# Altium PCB PCB1.PcbDoc (part 4 of 4)
Units mil, origin at the board's own origin, x right, y up, seen from the top; angles counter-clockwise.
Board outline 1280 x 1960 mil, 2 copper layers (Top Layer, Bottom Layer); 39 components, 61 nets, 283 pads, 76 vias.
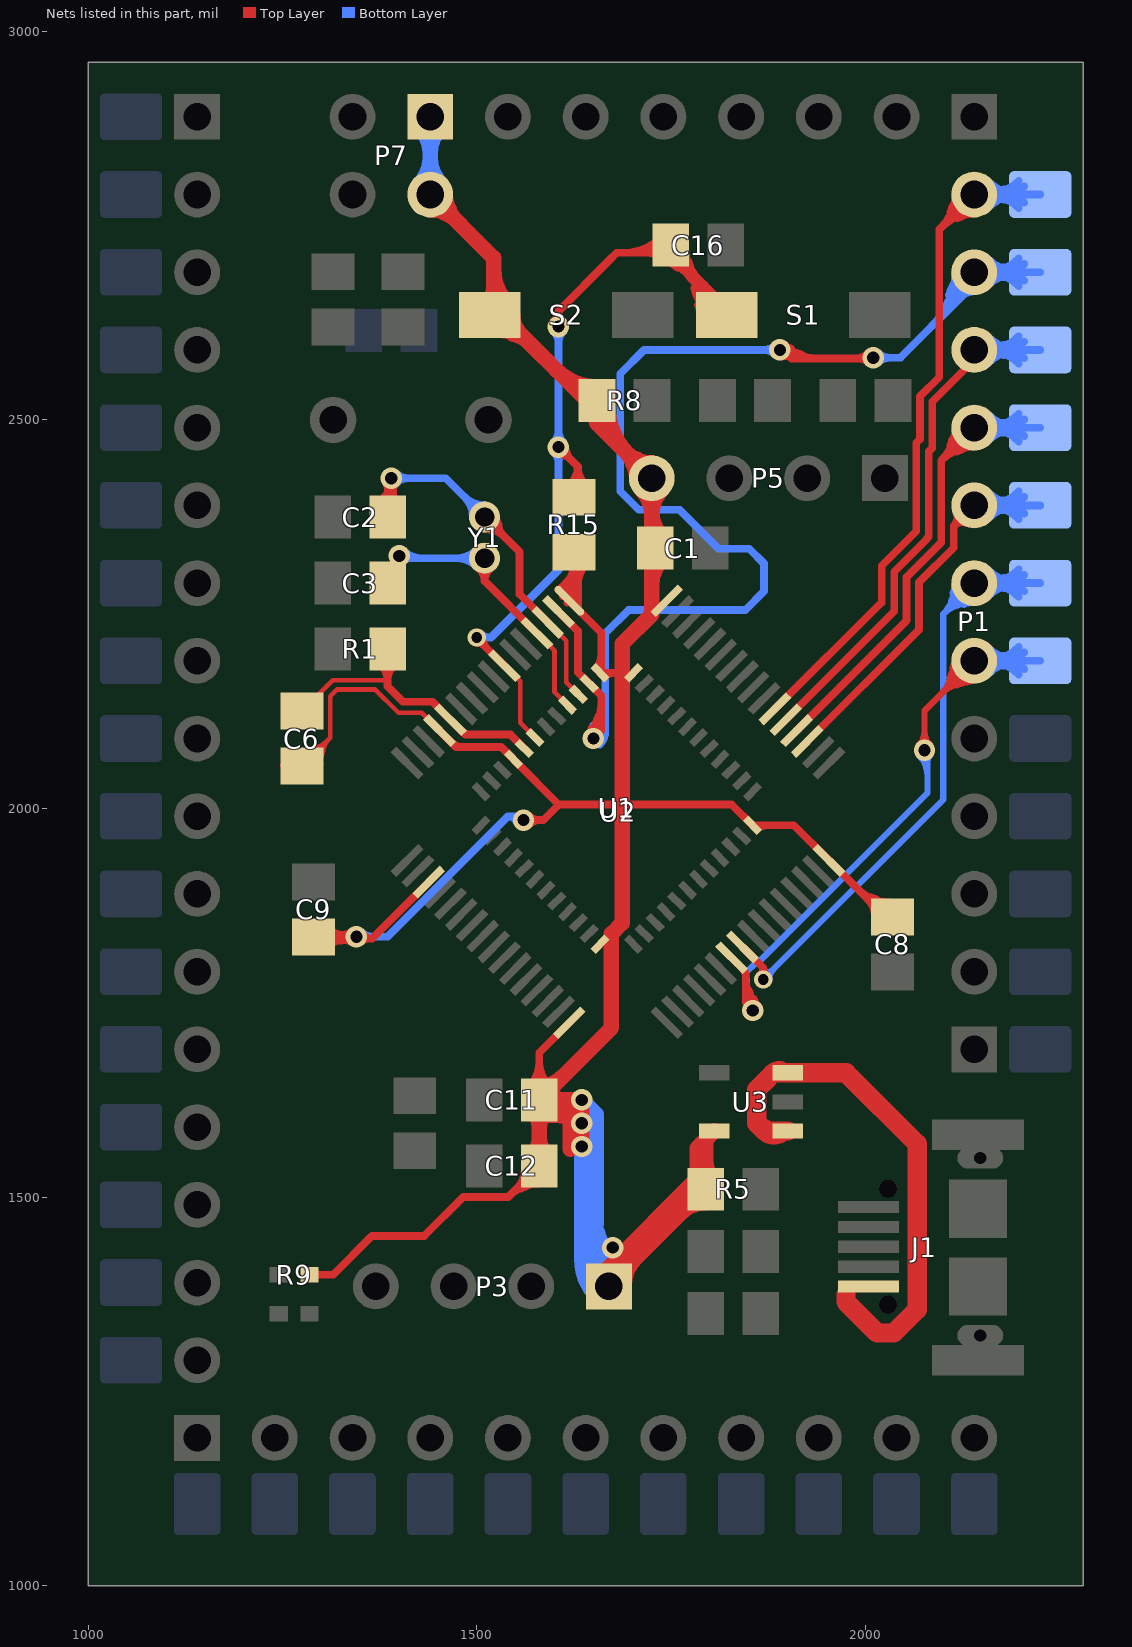
[diagram p4: the nets of this part, all layers, seen from the top]

## Via types
v1: diameter 27.56, hole 15.75, Top Layer to Bottom Layer, tented both sides, 72 vias
v2: diameter 23.62, hole 13.78, Top Layer to Bottom Layer, tented both sides, 4 vias

## Nets (pads, with @x,y where several pads share a name; then routed paths per layer and width w, separated by ;. In a path a pad name is that pad's centre, name@x,y a point inside that pad or via, vN(x,y) a via of type N, cw(c..) or ccw(c..) an arc to the next point about the centre after c; other vN are vias at no path point) (continued)
PC8: P1.6 pad.1@2225,2190 U2.39 | length 2982.2
  Top Layer w8: v1(2076,2075) 2076,2126 P1.6@2140,2190 ; 2105.21,2155.45 cw(c2149.51,2143.58) P1.6@2140.31,2188.5 ; 2105.45,2155.21 ccw(c2093.58,2199.51) P1.6@2138.5,2190.31 ; 2108.57,2167.96 cw(c2146.6,2157.76) P1.6@2138.7,2196.34 ; 2111.27,2162 cw(c2130.54,2151.85) P1.6@2135.78,2172.99 ; 2111.92,2180.46 cw(c2143.7,2171.95) P1.6@2137.1,2204.18 ; 2112,2161.27 ccw(c2101.85,2180.54) P1.6@2122.99,2185.78 ; 2114.25,2167.66 ccw(c2097.1,2176.7) P1.6@2115.62,2182.44 ; P1.6@2115.59,2182.53 cw(c2094.02,2175.92) 2110.08,2160.08 ; P1.6@2115.64,2182.38 cw(c2094.58,2175.79) 2110.08,2160.08 ; P1.6@2115.68,2182.24 cw(c2095.07,2175.67) 2110.47,2160.47 ; P1.6@2115.73,2182.09 cw(c2095.61,2175.53) 2110.47,2160.47 ; 2116.03,2171.03 cw(c2133.07,2162.06) P1.6@2137.71,2180.75 ; 2117.66,2164.25 cw(c2126.7,2147.1) P1.6@2132.44,2165.62 ; 2117.96,2158.57 ccw(c2107.76,2196.6) P1.6@2146.34,2188.7 ; 2121.03,2166.03 ccw(c2112.06,2183.07) P1.6@2130.75,2187.71 ; 2130.46,2161.92 ccw(c2121.95,2193.7) P1.6@2154.18,2187.1 ; P1.6@2132.09,2165.73 ccw(c2125.53,2145.61) 2110.47,2160.47 ; P1.6@2132.24,2165.68 ccw(c2125.67,2145.07) 2110.47,2160.47 ; P1.6@2132.38,2165.64 ccw(c2125.79,2144.58) 2110.08,2160.08 ; P1.6@2132.53,2165.59 ccw(c2125.92,2144.02) 2110.08,2160.08 ; 2076,2098.61 cw(c2052.39,2098.61) 2069.08,2081.92 ccw(c2052.39,2098.61) 2076,2098.61 ; 2076,2098.61 ccw(c2099.61,2098.61) 2082.92,2081.92 cw(c2099.61,2098.61) 2076,2098.61 ; 2096.42,2146.42 cw(c2140,2102.84) 2140,2164.47 ccw(c2140,2102.84) 2096.42,2146.42 ; 2096.42,2146.42 ccw(c2052.84,2190) 2114.47,2190 cw(c2052.84,2190) 2096.42,2146.42 ; 2110.08,2160.08 cw(c2140,2130.16) 2140,2172.47 ccw(c2140,2130.16) 2110.08,2160.08 ; 2110.08,2160.08 ccw(c2080.16,2190) 2122.47,2190 cw(c2080.16,2190) 2110.08,2160.08
  Top Layer w9: U2.39@1827.83,1807.9 1845.62,1790.1 1845.62,1749.38 v1(1855,1740) ; v1@1846.89,1744.51 ccw(c1837.86,1749.55) 1846.81,1754.72 ccw(c1856.31,1760.2) v1@1855.6,1749.26 ; v1@1848.04,1746.13 ccw(c1834.89,1757.72) 1850.06,1766.48 ; v1@1854.79,1740.18 ccw(c1844.81,1748.98) 1856.33,1755.63 ; U2.39@1841.62,1793.4 cw(c1831.95,1783.73) 1845.62,1783.73 ccw(c1831.95,1783.73) U2.39@1841.62,1793.4 ; U2.39@1841.86,1793.27 cw(c1840.83,1788.59) 1845.62,1788.59 ccw(c1840.83,1788.59) U2.39@1841.86,1793.27 ; 1845.62,1763.32 ccw(c1878.32,1763.32) 1855.2,1740.2 cw(c1878.32,1763.32) 1845.62,1763.32 ; 1845.62,1785.04 ccw(c1900.04,1785.04) 1861.56,1746.56 cw(c1900.04,1785.04) 1845.62,1785.04
  Bottom Layer w8: 1846.75,1753.25 1846.75,1789.03 1859.53,1801.81 1861.81,1801.81 2080,2020 v1@2080,2075 ; 2080,2061.05 cw(c2089.95,2061.05) 2082.92,2068.08 ccw(c2089.95,2061.05) 2080,2061.05 ; 2080,2061.05 ccw(c2062.05,2061.05) 2074.74,2073.74 cw(c2062.05,2061.05) 2080,2061.05 ; v1@2069.08,2068.08 cw(c2042.73,2041.73) 2080,2041.73 ccw(c2042.73,2041.73) v1@2069.08,2068.08
  Bottom Layer w10: P1.6@2140,2190 pad.1@2225,2190 ; P1.6@2160.62,2176.72 cw(c2174.28,2167.93) 2178.48,2183.61 cw(c2184.22,2205.04) P1.6@2163.22,2197.9 ; P1.6@2160.62,2203.28 ccw(c2174.28,2212.07) 2178.48,2196.39 ccw(c2184.22,2174.96) P1.6@2163.22,2182.1 ; P1.6@2154.64,2190 cw(c2154.64,2129.64) 2197.32,2172.32 ccw(c2154.64,2129.64) P1.6@2154.64,2190 ; P1.6@2154.64,2190 ccw(c2154.64,2250.36) 2197.32,2207.68 cw(c2154.64,2250.36) P1.6@2154.64,2190 ; 2175.07,2190 cw(c2175.07,2225.07) 2150.27,2200.27 ccw(c2175.07,2225.07) 2175.07,2190 ; 2175.07,2190 ccw(c2175.07,2154.93) 2150.27,2179.73 cw(c2175.07,2154.93) 2175.07,2190 ; 2176.44,2183.9 cw(c2180.44,2168.97) pad.1@2193.64,2177.01 ; 2176.44,2183.9 ccw(c2170.88,2204.65) pad.1@2191.27,2197.88 ; 2176.44,2183.9 ccw(c2170.88,2204.65) pad.1@2191.27,2197.88 ; 2176.44,2183.9 cw(c2180.44,2168.97) pad.1@2193.64,2177.01 ; 2176.44,2183.9 ccw(c2170.88,2204.65) pad.1@2191.27,2197.88 ; 2176.44,2183.9 cw(c2180.44,2168.97) pad.1@2193.64,2177.01 ; 2176.44,2196.1 cw(c2170.88,2175.35) pad.1@2191.27,2182.12 ; 2176.44,2196.1 ccw(c2180.44,2211.03) pad.1@2193.64,2202.99 ; 2176.44,2196.1 ccw(c2180.44,2211.03) pad.1@2193.64,2202.99 ; 2176.44,2196.1 cw(c2170.88,2175.35) pad.1@2191.27,2182.12 ; 2176.44,2196.1 ccw(c2180.44,2211.03) pad.1@2193.64,2202.99 ; 2176.44,2196.1 cw(c2170.88,2175.35) pad.1@2191.27,2182.12 ; 2178.79,2190 cw(c2178.79,2153.79) 2204.39,2179.39 ccw(c2178.79,2153.79) 2178.79,2190 ; 2178.79,2190 ccw(c2178.79,2226.21) 2204.39,2200.61 cw(c2178.79,2226.21) 2178.79,2190 ; pad.1@2199.21,2190 cw(c2199.21,2249.21) 2157.34,2207.34 ccw(c2199.21,2249.21) pad.1@2199.21,2190 ; pad.1@2199.21,2190 ccw(c2199.21,2130.79) 2157.34,2172.66 cw(c2199.21,2130.79) pad.1@2199.21,2190
PC9: P1.7 pad.1@2225,2290 U2.40 | length 2245.3
  Top Layer w10: U2.40@1841.75,1821.81 1868.56,1795 ; v2(1868.56,1780) 1868.56,1795 ; 1868.56,1795 cw(c1855.45,1795) 1864.08,1785.13 ccw(c1855.45,1795) 1868.56,1795 ; 1868.56,1795 ccw(c1881.67,1795) 1873.04,1785.13 cw(c1881.67,1795) 1868.56,1795
  Bottom Layer w8: v2(1868.56,1780) 2100,2011.44 2100,2250 ; 2109.3,2262.57 cw(c2153.84,2253.57) P1.7@2137.7,2296.05 ; 2112.17,2276.79 cw(c2147.75,2269.6) P1.7@2134.86,2303.53 ; 2112.57,2259.3 ccw(c2103.57,2303.84) P1.7@2146.05,2287.7 ; 2126.79,2262.17 ccw(c2119.6,2297.75) P1.7@2153.53,2284.86 ; P1.7@2140,2290 2100,2250 ; 1881.9,1793.33 cw(c1868.56,1806.67) 1868.56,1787.81 ccw(c1868.56,1806.67) 1881.9,1793.33 ; 1881.9,1793.33 ccw(c1895.23,1780) 1876.37,1780 cw(c1895.23,1780) 1881.9,1793.33 ; 2100,2250 cw(c2135.29,2214.71) 2138.41,2264.52 ccw(c2135.29,2214.71) 2100,2250 ; 2100,2250 ccw(c2064.71,2285.29) 2114.52,2288.41 cw(c2064.71,2285.29) 2100,2250 ; 2112.54,2262.54 cw(c2136.77,2238.31) 2138.91,2272.51 ccw(c2136.77,2238.31) 2112.54,2262.54 ; 2112.54,2262.54 ccw(c2088.31,2286.77) 2122.51,2288.91 cw(c2088.31,2286.77) 2112.54,2262.54
  Bottom Layer w10: P1.7@2140,2290 pad.1@2225,2290 ; P1.7@2160.62,2276.72 cw(c2174.28,2267.93) 2178.48,2283.61 cw(c2184.22,2305.04) P1.7@2163.22,2297.9 ; P1.7@2160.62,2303.28 ccw(c2174.28,2312.07) 2178.48,2296.39 ccw(c2184.22,2274.96) P1.7@2163.22,2282.1 ; P1.7@2154.64,2290 cw(c2154.64,2229.64) 2197.32,2272.32 ccw(c2154.64,2229.64) P1.7@2154.64,2290 ; P1.7@2154.64,2290 ccw(c2154.64,2350.36) 2197.32,2307.68 cw(c2154.64,2350.36) P1.7@2154.64,2290 ; 2175.07,2290 cw(c2175.07,2325.07) 2150.27,2300.27 ccw(c2175.07,2325.07) 2175.07,2290 ; 2175.07,2290 ccw(c2175.07,2254.93) 2150.27,2279.73 cw(c2175.07,2254.93) 2175.07,2290 ; 2176.44,2283.9 cw(c2180.44,2268.97) pad.1@2193.64,2277.01 ; 2176.44,2283.9 ccw(c2170.88,2304.65) pad.1@2191.27,2297.88 ; 2176.44,2283.9 ccw(c2170.88,2304.65) pad.1@2191.27,2297.88 ; 2176.44,2283.9 cw(c2180.44,2268.97) pad.1@2193.64,2277.01 ; 2176.44,2283.9 ccw(c2170.88,2304.65) pad.1@2191.27,2297.88 ; 2176.44,2283.9 cw(c2180.44,2268.97) pad.1@2193.64,2277.01 ; 2176.44,2296.1 cw(c2170.88,2275.35) pad.1@2191.27,2282.12 ; 2176.44,2296.1 ccw(c2180.44,2311.03) pad.1@2193.64,2302.99 ; 2176.44,2296.1 ccw(c2180.44,2311.03) pad.1@2193.64,2302.99 ; 2176.44,2296.1 cw(c2170.88,2275.35) pad.1@2191.27,2282.12 ; 2176.44,2296.1 ccw(c2180.44,2311.03) pad.1@2193.64,2302.99 ; 2176.44,2296.1 cw(c2170.88,2275.35) pad.1@2191.27,2282.12 ; 2178.79,2290 cw(c2178.79,2253.79) 2204.39,2279.39 ccw(c2178.79,2253.79) 2178.79,2290 ; 2178.79,2290 ccw(c2178.79,2326.21) 2204.39,2300.61 cw(c2178.79,2326.21) 2178.79,2290 ; pad.1@2199.21,2290 cw(c2199.21,2349.21) 2157.34,2307.34 ccw(c2199.21,2349.21) pad.1@2199.21,2290 ; pad.1@2199.21,2290 ccw(c2199.21,2230.79) 2157.34,2272.66 cw(c2199.21,2230.79) pad.1@2199.21,2290
PC10: P1.8 pad.1@2225,2390 U2.51 | length 1484
  Top Layer w10: U2.51@1925.26,2086.28 2069,2230.02 2069,2291.12 2113.53,2335.65 2113.53,2363.53 ; P1.8@2140,2390 2113.53,2363.53 ; 2113.53,2363.53 cw(c2125.06,2352) 2131.03,2367.17 ccw(c2125.06,2352) 2113.53,2363.53 ; 2113.53,2363.53 ccw(c2102,2375.06) 2117.17,2381.03 cw(c2102,2375.06) 2113.53,2363.53
  Bottom Layer w10: P1.8@2140,2390 pad.1@2225,2390 ; P1.8@2160.62,2376.72 cw(c2174.28,2367.93) 2178.48,2383.61 cw(c2184.22,2405.04) P1.8@2163.22,2397.9 ; P1.8@2160.62,2403.28 ccw(c2174.28,2412.07) 2178.48,2396.39 ccw(c2184.22,2374.96) P1.8@2163.22,2382.1 ; P1.8@2154.64,2390 cw(c2154.64,2329.64) 2197.32,2372.32 ccw(c2154.64,2329.64) P1.8@2154.64,2390 ; P1.8@2154.64,2390 ccw(c2154.64,2450.36) 2197.32,2407.68 cw(c2154.64,2450.36) P1.8@2154.64,2390 ; 2175.07,2390 cw(c2175.07,2425.07) 2150.27,2400.27 ccw(c2175.07,2425.07) 2175.07,2390 ; 2175.07,2390 ccw(c2175.07,2354.93) 2150.27,2379.73 cw(c2175.07,2354.93) 2175.07,2390 ; 2176.44,2383.9 cw(c2180.44,2368.97) pad.1@2193.64,2377.01 ; 2176.44,2383.9 ccw(c2170.88,2404.65) pad.1@2191.27,2397.88 ; 2176.44,2383.9 ccw(c2170.88,2404.65) pad.1@2191.27,2397.88 ; 2176.44,2383.9 cw(c2180.44,2368.97) pad.1@2193.64,2377.01 ; 2176.44,2383.9 ccw(c2170.88,2404.65) pad.1@2191.27,2397.88 ; 2176.44,2383.9 cw(c2180.44,2368.97) pad.1@2193.64,2377.01 ; 2176.44,2396.1 cw(c2170.88,2375.35) pad.1@2191.27,2382.12 ; 2176.44,2396.1 ccw(c2180.44,2411.03) pad.1@2193.64,2402.99 ; 2176.44,2396.1 ccw(c2180.44,2411.03) pad.1@2193.64,2402.99 ; 2176.44,2396.1 cw(c2170.88,2375.35) pad.1@2191.27,2382.12 ; 2176.44,2396.1 ccw(c2180.44,2411.03) pad.1@2193.64,2402.99 ; 2176.44,2396.1 cw(c2170.88,2375.35) pad.1@2191.27,2382.12 ; 2178.79,2390 cw(c2178.79,2353.79) 2204.39,2379.39 ccw(c2178.79,2353.79) 2178.79,2390 ; 2178.79,2390 ccw(c2178.79,2426.21) 2204.39,2400.61 cw(c2178.79,2426.21) 2178.79,2390 ; pad.1@2199.21,2390 cw(c2199.21,2449.21) 2157.34,2407.34 ccw(c2199.21,2449.21) pad.1@2199.21,2390 ; pad.1@2199.21,2390 ccw(c2199.21,2330.79) 2157.34,2372.66 cw(c2199.21,2330.79) pad.1@2199.21,2390
PC11: P1.9 pad.1@2225,2490 U2.52 | length 1881.5
  Top Layer w10: U2.52@1911.34,2100.2 2053,2241.86 2053,2297.75 2097.53,2342.27 2097.53,2447.53 P1.9@2140,2490 ; 2109.48,2467.65 cw(c2146.61,2457.7) P1.9@2138.9,2495.36 ; 2117.65,2459.48 ccw(c2107.7,2496.61) P1.9@2145.36,2488.9 ; 2098.13,2448.13 cw(c2140,2406.26) 2140,2465.47 ccw(c2140,2406.26) 2098.13,2448.13 ; 2098.13,2448.13 ccw(c2056.26,2490) 2115.47,2490 cw(c2056.26,2490) 2098.13,2448.13 ; 2115.2,2465.2 cw(c2140,2440.4) 2140,2475.47 ccw(c2140,2440.4) 2115.2,2465.2 ; 2115.2,2465.2 ccw(c2090.4,2490) 2125.47,2490 cw(c2090.4,2490) 2115.2,2465.2
  Bottom Layer w10: P1.9@2140,2490 pad.1@2225,2490 ; P1.9@2160.62,2476.72 cw(c2174.28,2467.93) 2178.48,2483.61 cw(c2184.22,2505.04) P1.9@2163.22,2497.9 ; P1.9@2160.62,2503.28 ccw(c2174.28,2512.07) 2178.48,2496.39 ccw(c2184.22,2474.96) P1.9@2163.22,2482.1 ; P1.9@2154.64,2490 cw(c2154.64,2429.64) 2197.32,2472.32 ccw(c2154.64,2429.64) P1.9@2154.64,2490 ; P1.9@2154.64,2490 ccw(c2154.64,2550.36) 2197.32,2507.68 cw(c2154.64,2550.36) P1.9@2154.64,2490 ; 2175.07,2490 cw(c2175.07,2525.07) 2150.27,2500.27 ccw(c2175.07,2525.07) 2175.07,2490 ; 2175.07,2490 ccw(c2175.07,2454.93) 2150.27,2479.73 cw(c2175.07,2454.93) 2175.07,2490 ; 2176.44,2483.9 cw(c2180.44,2468.97) pad.1@2193.64,2477.01 ; 2176.44,2483.9 ccw(c2170.88,2504.65) pad.1@2191.27,2497.88 ; 2176.44,2483.9 ccw(c2170.88,2504.65) pad.1@2191.27,2497.88 ; 2176.44,2483.9 cw(c2180.44,2468.97) pad.1@2193.64,2477.01 ; 2176.44,2483.9 ccw(c2170.88,2504.65) pad.1@2191.27,2497.88 ; 2176.44,2483.9 cw(c2180.44,2468.97) pad.1@2193.64,2477.01 ; 2176.44,2496.1 cw(c2170.88,2475.35) pad.1@2191.27,2482.12 ; 2176.44,2496.1 ccw(c2180.44,2511.03) pad.1@2193.64,2502.99 ; 2176.44,2496.1 ccw(c2180.44,2511.03) pad.1@2193.64,2502.99 ; 2176.44,2496.1 cw(c2170.88,2475.35) pad.1@2191.27,2482.12 ; 2176.44,2496.1 ccw(c2180.44,2511.03) pad.1@2193.64,2502.99 ; 2176.44,2496.1 cw(c2170.88,2475.35) pad.1@2191.27,2482.12 ; 2178.79,2490 cw(c2178.79,2453.79) 2204.39,2479.39 ccw(c2178.79,2453.79) 2178.79,2490 ; 2178.79,2490 ccw(c2178.79,2526.21) 2204.39,2500.61 cw(c2178.79,2526.21) 2178.79,2490 ; pad.1@2199.21,2490 cw(c2199.21,2549.21) 2157.34,2507.34 ccw(c2199.21,2549.21) pad.1@2199.21,2490 ; pad.1@2199.21,2490 ccw(c2199.21,2430.79) 2157.34,2472.66 cw(c2199.21,2430.79) pad.1@2199.21,2490
PC12: P1.10 pad.1@2225,2590 U2.53 | length 1592
  Top Layer w10: U2.53@1897.43,2114.12 2037,2253.7 2037,2304.37 2079,2346.37 2079,2347.47 2081.53,2350 2081.53,2459.37 2086.06,2463.9 2086.06,2523.43 2140,2577.37 P1.10@2140,2590
  Bottom Layer w10: P1.10@2140,2590 pad.1@2225,2590 ; P1.10@2160.62,2576.72 cw(c2174.28,2567.93) 2178.48,2583.61 cw(c2184.22,2605.04) P1.10@2163.22,2597.9 ; P1.10@2160.62,2603.28 ccw(c2174.28,2612.07) 2178.48,2596.39 ccw(c2184.22,2574.96) P1.10@2163.22,2582.1 ; P1.10@2154.64,2590 cw(c2154.64,2529.64) 2197.32,2572.32 ccw(c2154.64,2529.64) P1.10@2154.64,2590 ; P1.10@2154.64,2590 ccw(c2154.64,2650.36) 2197.32,2607.68 cw(c2154.64,2650.36) P1.10@2154.64,2590 ; 2175.07,2590 cw(c2175.07,2625.07) 2150.27,2600.27 ccw(c2175.07,2625.07) 2175.07,2590 ; 2175.07,2590 ccw(c2175.07,2554.93) 2150.27,2579.73 cw(c2175.07,2554.93) 2175.07,2590 ; 2176.44,2583.9 cw(c2180.44,2568.97) pad.1@2193.64,2577.01 ; 2176.44,2583.9 ccw(c2170.88,2604.65) pad.1@2191.27,2597.88 ; 2176.44,2583.9 ccw(c2170.88,2604.65) pad.1@2191.27,2597.88 ; 2176.44,2583.9 cw(c2180.44,2568.97) pad.1@2193.64,2577.01 ; 2176.44,2583.9 ccw(c2170.88,2604.65) pad.1@2191.27,2597.88 ; 2176.44,2583.9 cw(c2180.44,2568.97) pad.1@2193.64,2577.01 ; 2176.44,2596.1 cw(c2170.88,2575.35) pad.1@2191.27,2582.12 ; 2176.44,2596.1 ccw(c2180.44,2611.03) pad.1@2193.64,2602.99 ; 2176.44,2596.1 ccw(c2180.44,2611.03) pad.1@2193.64,2602.99 ; 2176.44,2596.1 cw(c2170.88,2575.35) pad.1@2191.27,2582.12 ; 2176.44,2596.1 ccw(c2180.44,2611.03) pad.1@2193.64,2602.99 ; 2176.44,2596.1 cw(c2170.88,2575.35) pad.1@2191.27,2582.12 ; 2178.79,2590 cw(c2178.79,2553.79) 2204.39,2579.39 ccw(c2178.79,2553.79) 2178.79,2590 ; 2178.79,2590 ccw(c2178.79,2626.21) 2204.39,2600.61 cw(c2178.79,2626.21) 2178.79,2590 ; pad.1@2199.21,2590 cw(c2199.21,2649.21) 2157.34,2607.34 ccw(c2199.21,2649.21) pad.1@2199.21,2590 ; pad.1@2199.21,2590 ccw(c2199.21,2530.79) 2157.34,2572.66 cw(c2199.21,2530.79) pad.1@2199.21,2590
PC13: P1.11 pad.1@2225,2690 U1.2 U2.2 | length 4094.8
  Top Layer w10: U2.2@1605.12,2253.32 1630,2228.43 1630,2175.28 U1.2@1644.51,2160.77 1660,2145.28 1660,2100 ; 1648.13,2103.72 ccw(c1659.47,2097.17) v1@1649.03,2089.26 ; v1(1650,2090) 1660,2100 ; v1@1650.34,2098.77 ccw(c1650.71,2108.66) 1659.28,2103.71 ccw(c1670.5,2097.23) v1@1658.28,2092.92 ; 1655.67,2116.77 ccw(c1672.52,2107.04) v1@1657,2095.3 ; v1@1889.32,2591.02 cw(c1897.23,2579.15) 1904.36,2591.5 ; v1(1890,2590) 1894,2590 1905,2579 ; v1@1892.3,2581.53 cw(c1896.74,2565.12) 1905.24,2579.84 cw(c1911.73,2591.08) v1@1898.77,2590.43 ; v1@1894.87,2582.7 cw(c1907.2,2564.21) 1918.3,2583.45 ; v1(2010,2580) 2009,2579 1905,2579 ; 1660,2100 cw(c1655.05,2104.95) 1652.81,2098.32 ccw(c1655.05,2104.95) 1660,2100 ; 1660,2100 ccw(c1664.95,2095.05) 1658.32,2092.81 cw(c1664.95,2095.05) 1660,2100 ; 1905,2579 ccw(c1896.81,2570.81) 1892.94,2581.73 cw(c1896.81,2570.81) 1905,2579 ; v1@1643.79,2096.21 ccw(c1604.66,2135.34) 1660,2135.34 cw(c1604.66,2135.34) v1@1643.79,2096.21 ; v1@1650.86,2089.14 ccw(c1628.8,2111.2) 1660,2111.2 cw(c1628.8,2111.2) v1@1650.86,2089.14 ; v1@1889.14,2589.14 ccw(c1913.61,2613.61) 1913.61,2579 cw(c1913.61,2613.61) v1@1889.14,2589.14 ; v1@1896.21,2596.21 ccw(c1937.75,2637.75) 1937.75,2579 cw(c1937.75,2637.75) v1@1896.21,2596.21 ; v1@1898.78,2590 ccw(c1910.32,2590) 1902.16,2581.84 cw(c1910.32,2590) v1@1898.78,2590 ; 1986.39,2579 ccw(c1986.39,2603.61) 2003.79,2586.21 cw(c1986.39,2603.61) 1986.39,2579 ; 1991.22,2579 cw(c1991.22,2561.22) 2003.79,2573.79 ccw(c1991.22,2561.22) 1991.22,2579
  Bottom Layer w10: v1@1647.73,2098.48 ccw(c1641.2,2122.84) 1663.04,2110.23 ; v1@1648.87,2089.54 cw(c1667.47,2097.08) 1650.09,2107.11 ; v1(1650,2090) 1660,2090 1665.28,2095.28 1665.28,2225.28 1695.22,2255.22 1845.22,2255.22 1869.56,2279.56 1869.56,2315.26 1850.6,2334.22 1810.98,2334.22 1760.73,2384.47 1708.21,2384.47 1684.47,2408.21 1684.47,2559.47 1715,2590 v1(1890,2590) ; v1@1658.14,2093.3 cw(c1691.54,2106.83) 1660.33,2124.85 ; v1@1658.48,2092.27 cw(c1675.07,2096.72) 1660.2,2105.3 ; v1(2010,2580) 2044.96,2580 2124.96,2660 ; 2102.47,2641.46 cw(c2166.56,2624.28) P1.11@2141.7,2685.8 ; 2107.66,2660.83 cw(c2157.15,2647.57) P1.11@2137.95,2695.07 ; 2118.36,2663.45 cw(c2148.35,2655.42) P1.11@2141.06,2685.6 ; P1.11@2160.62,2676.72 cw(c2174.28,2667.93) 2178.48,2683.61 cw(c2184.22,2705.04) P1.11@2163.22,2697.9 ; P1.11@2160.62,2703.28 ccw(c2174.28,2712.07) 2178.48,2696.39 ccw(c2184.22,2674.96) P1.11@2163.22,2682.1 ; pad.1@2225,2690 P1.11@2140,2690 2140,2675 2125,2660 ; 1868.8,2590 cw(c1868.8,2568.8) 1883.79,2583.79 ccw(c1868.8,2568.8) 1868.8,2590 ; 1868.8,2590 ccw(c1868.8,2611.2) 1883.79,2596.21 cw(c1868.8,2611.2) 1868.8,2590 ; 2031.2,2580 cw(c2031.2,2601.2) 2016.21,2586.21 ccw(c2031.2,2601.2) 2031.2,2580 ; 2031.2,2580 ccw(c2031.2,2558.8) 2016.21,2573.79 cw(c2031.2,2558.8) 2031.2,2580 ; 2124.96,2660 cw(c2138.25,2646.71) 2139.01,2665.49 ccw(c2138.25,2646.71) 2124.96,2660 ; 2125,2660 cw(c2138.29,2646.71) 2139.03,2665.49 ccw(c2138.29,2646.71) 2125,2660 ; P1.11@2154.64,2690 cw(c2154.64,2629.64) 2197.32,2672.32 ccw(c2154.64,2629.64) P1.11@2154.64,2690 ; P1.11@2154.64,2690 ccw(c2154.64,2750.36) 2197.32,2707.68 cw(c2154.64,2750.36) P1.11@2154.64,2690 ; 2175.07,2690 cw(c2175.07,2725.07) 2150.27,2700.27 ccw(c2175.07,2725.07) 2175.07,2690 ; 2175.07,2690 ccw(c2175.07,2654.93) 2150.27,2679.73 cw(c2175.07,2654.93) 2175.07,2690 ; 2176.44,2683.9 cw(c2180.44,2668.97) pad.1@2193.64,2677.01 ; 2176.44,2683.9 ccw(c2170.88,2704.65) pad.1@2191.27,2697.88 ; 2176.44,2683.9 ccw(c2170.88,2704.65) pad.1@2191.27,2697.88 ; 2176.44,2683.9 cw(c2180.44,2668.97) pad.1@2193.64,2677.01 ; 2176.44,2683.9 ccw(c2170.88,2704.65) pad.1@2191.27,2697.88 ; 2176.44,2683.9 cw(c2180.44,2668.97) pad.1@2193.64,2677.01 ; 2176.44,2696.1 cw(c2170.88,2675.35) pad.1@2191.27,2682.12 ; 2176.44,2696.1 ccw(c2180.44,2711.03) pad.1@2193.64,2702.99 ; 2176.44,2696.1 ccw(c2180.44,2711.03) pad.1@2193.64,2702.99 ; 2176.44,2696.1 cw(c2170.88,2675.35) pad.1@2191.27,2682.12 ; 2176.44,2696.1 ccw(c2180.44,2711.03) pad.1@2193.64,2702.99 ; 2176.44,2696.1 cw(c2170.88,2675.35) pad.1@2191.27,2682.12 ; 2178.79,2690 cw(c2178.79,2653.79) 2204.39,2679.39 ccw(c2178.79,2653.79) 2178.79,2690 ; 2178.79,2690 ccw(c2178.79,2726.21) 2204.39,2700.61 cw(c2178.79,2726.21) 2178.79,2690 ; pad.1@2199.21,2690 cw(c2199.21,2749.21) 2157.34,2707.34 ccw(c2199.21,2749.21) pad.1@2199.21,2690 ; pad.1@2199.21,2690 ccw(c2199.21,2630.79) 2157.34,2672.66 cw(c2199.21,2630.79) pad.1@2199.21,2690 ; v1@1643.79,2096.21 ccw(c1591.92,2148.08) 1665.28,2148.08 cw(c1591.92,2148.08) v1@1643.79,2096.21 ; v1@1650.86,2089.14 ccw(c1616.07,2123.93) 1665.28,2123.93 cw(c1616.07,2123.93) v1@1650.86,2089.14 ; v1@1657.93,2082.07 ccw(c1640.21,2099.79) 1665.28,2099.79 cw(c1640.21,2099.79) v1@1657.93,2082.07 ; 2087.55,2622.6 ccw(c2020.15,2690) 2115.47,2690 cw(c2020.15,2690) 2087.55,2622.6 ; 2104.62,2639.67 ccw(c2054.29,2690) 2125.47,2690 cw(c2054.29,2690) 2104.62,2639.67 ; 2121.7,2656.74 ccw(c2088.43,2690) 2135.47,2690 cw(c2088.43,2690) 2121.7,2656.74 ; 2123.66,2658.7 cw(c2140,2642.37) 2140,2665.47 ccw(c2140,2642.37) 2123.66,2658.7
PC14: C2.2 U1.3 U2.3 Y1.1 | length 1210.6
  Top Layer w6: U2.3@1591.2,2239.4 1615,2215.6 1615,2162.44 U1.3@1630.59,2146.85 U1.3@1630.59,2147.24
  Top Layer w10: C2.2@1385.43,2375 1390,2379.57 v1(1390,2425) ; Y1.1@1505.1,2374 ccw(c1526.82,2378.44) 1521.08,2357.03 ; Y1.1@1510,2375 1555,2330 1555,2275.6 U2.3@1591.2,2239.4 ; Y1.1@1511,2379.9 cw(c1506.56,2358.18) 1527.97,2363.92 ; v1@1382.58,2420.31 cw(c1366.95,2410.42) 1384.81,2405.64 ; v1@1382.58,2420.31 cw(c1366.95,2410.42) 1384.81,2405.64 ; v1@1382.58,2420.31 cw(c1366.95,2410.42) 1384.81,2405.64 ; 1384.81,2405.64 cw(c1402.67,2400.85) v1@1394.08,2417.23 ; 1384.81,2405.64 cw(c1402.67,2400.85) v1@1394.08,2417.23 ; 1384.81,2405.64 cw(c1402.67,2400.85) v1@1394.08,2417.23 ; v1@1385.61,2417.4 cw(c1380.37,2408.32) 1390.49,2411.03 ; v1@1385.61,2417.4 cw(c1380.37,2408.32) 1390.49,2411.03 ; v1@1385.61,2417.4 cw(c1380.37,2408.32) 1390.49,2411.03 ; 1390,2403.8 cw(c1411.2,2403.8) 1396.21,2418.79 ccw(c1411.2,2403.8) 1390,2403.8 ; 1390,2403.8 ccw(c1368.8,2403.8) 1383.79,2418.79 cw(c1368.8,2403.8) 1390,2403.8 ; v1(1390,2425) cw(c1351.28,2425) 1374.34,2393.9 ccw(c1351.28,2425) v1(1390,2425) ; 1392.53,2403.44 cw(c1408.5,2407.72) v1@1396.42,2419.01 ; 1392.53,2403.44 cw(c1408.5,2407.72) v1@1396.42,2419.01 ; 1392.53,2403.44 cw(c1408.5,2407.72) v1@1396.42,2419.01 ; 1535.61,2349.39 cw(c1561.21,2375) 1525,2375 ccw(c1561.21,2375) 1535.61,2349.39 ; 1535.61,2349.39 ccw(c1510,2323.79) 1510,2360 cw(c1510,2323.79) 1535.61,2349.39 ; C2.2@1380.3,2385.86 ccw(c1366.01,2405.13) 1390,2405.13 cw(c1366.01,2405.13) C2.2@1380.3,2385.86 ; v1@1390,2412.87 ccw(c1419.37,2412.87) 1398.6,2392.1 cw(c1419.37,2412.87) v1@1390,2412.87
  Bottom Layer w10: v1(1390,2425) 1460,2425 Y1.1@1510,2375 ; 1411.2,2425 cw(c1411.2,2446.2) 1396.21,2431.21 ccw(c1411.2,2446.2) 1411.2,2425 ; 1411.2,2425 ccw(c1411.2,2403.8) 1396.21,2418.79 cw(c1411.2,2403.8) 1411.2,2425 ; 1484.39,2400.61 cw(c1458.79,2375) 1495,2375 ccw(c1458.79,2375) 1484.39,2400.61 ; 1484.39,2400.61 ccw(c1510,2426.21) 1510,2390 cw(c1510,2426.21) 1484.39,2400.61
PC15: C3.2 U1.4 U2.4 Y1.2 | length 645.3
  Top Layer w6: C3.2@1385.43,2290 C3.2@1405,2290 ; U2.4@1577.28,2225.48 1600,2202.76 1600,2149.6 U1.4@1616.67,2132.93
  Top Layer w10: C3.2@1385.43,2290 C3.2@1400.43,2275 ; Y1.2@1510,2322 1510,2292.76 ; U2.4@1577.28,2225.48 1510,2292.76 ; 1510,2292.76 cw(c1531,2292.76) 1518.75,2309.82 ccw(c1531,2292.76) 1510,2292.76 ; 1510,2292.76 ccw(c1489,2292.76) 1501.25,2309.82 cw(c1489,2292.76) 1510,2292.76
  Bottom Layer w10: v1(1400,2325) 1403,2322 Y1.2@1510,2322 ; 1473.79,2322 cw(c1473.79,2285.79) 1499.39,2311.39 ccw(c1473.79,2285.79) 1473.79,2322 ; 1473.79,2322 ccw(c1473.79,2358.21) 1499.39,2332.61 cw(c1473.79,2358.21) 1473.79,2322 ; v1@1406.21,2318.79 cw(c1413.95,2311.05) 1413.95,2322 ccw(c1413.95,2311.05) v1@1406.21,2318.79 ; v1@1406.21,2331.21 ccw(c1428.44,2353.44) 1428.44,2322 cw(c1428.44,2353.44) v1@1406.21,2331.21
PD2: P1.12 pad.1@2225,2790 U2.54 | length 2164.9
  Top Layer w10: U2.54@1883.51,2128.04 2020.23,2264.77 ; 2021,2264.77 2021,2312.1 2065.53,2356.63 2065.53,2470.53 2070.06,2475.06 2070.06,2530.06 2095,2555 2095,2745 P1.12@2140,2790 ; 2109.48,2767.65 cw(c2146.61,2757.7) P1.12@2138.9,2795.36 ; 2117.65,2759.48 ccw(c2107.7,2796.61) P1.12@2145.36,2788.9 ; 2098.13,2748.13 cw(c2140,2706.26) 2140,2765.47 ccw(c2140,2706.26) 2098.13,2748.13 ; 2098.13,2748.13 ccw(c2056.26,2790) 2115.47,2790 cw(c2056.26,2790) 2098.13,2748.13 ; 2115.2,2765.2 cw(c2140,2740.4) 2140,2775.47 ccw(c2140,2740.4) 2115.2,2765.2 ; 2115.2,2765.2 ccw(c2090.4,2790) 2125.47,2790 cw(c2090.4,2790) 2115.2,2765.2
  Bottom Layer w10: P1.12@2140,2790 pad.1@2225,2790 ; P1.12@2160.62,2776.72 cw(c2174.28,2767.93) 2178.48,2783.61 cw(c2184.22,2805.04) P1.12@2163.22,2797.9 ; P1.12@2160.62,2803.28 ccw(c2174.28,2812.07) 2178.48,2796.39 ccw(c2184.22,2774.96) P1.12@2163.22,2782.1 ; P1.12@2154.64,2790 cw(c2154.64,2729.64) 2197.32,2772.32 ccw(c2154.64,2729.64) P1.12@2154.64,2790 ; P1.12@2154.64,2790 ccw(c2154.64,2850.36) 2197.32,2807.68 cw(c2154.64,2850.36) P1.12@2154.64,2790 ; 2175.07,2790 cw(c2175.07,2825.07) 2150.27,2800.27 ccw(c2175.07,2825.07) 2175.07,2790 ; 2175.07,2790 ccw(c2175.07,2754.93) 2150.27,2779.73 cw(c2175.07,2754.93) 2175.07,2790 ; 2176.44,2783.9 cw(c2180.44,2768.97) pad.1@2193.64,2777.01 ; 2176.44,2783.9 ccw(c2170.88,2804.65) pad.1@2191.27,2797.88 ; 2176.44,2783.9 ccw(c2170.88,2804.65) pad.1@2191.27,2797.88 ; 2176.44,2783.9 cw(c2180.44,2768.97) pad.1@2193.64,2777.01 ; 2176.44,2783.9 ccw(c2170.88,2804.65) pad.1@2191.27,2797.88 ; 2176.44,2783.9 cw(c2180.44,2768.97) pad.1@2193.64,2777.01 ; 2176.44,2796.1 cw(c2170.88,2775.35) pad.1@2191.27,2782.12 ; 2176.44,2796.1 ccw(c2180.44,2811.03) pad.1@2193.64,2802.99 ; 2176.44,2796.1 ccw(c2180.44,2811.03) pad.1@2193.64,2802.99 ; 2176.44,2796.1 cw(c2170.88,2775.35) pad.1@2191.27,2782.12 ; 2176.44,2796.1 ccw(c2180.44,2811.03) pad.1@2193.64,2802.99 ; 2176.44,2796.1 cw(c2170.88,2775.35) pad.1@2191.27,2782.12 ; 2178.79,2790 cw(c2178.79,2753.79) 2204.39,2779.39 ccw(c2178.79,2753.79) 2178.79,2790 ; 2178.79,2790 ccw(c2178.79,2826.21) 2204.39,2800.61 cw(c2178.79,2826.21) 2178.79,2790 ; pad.1@2199.21,2790 cw(c2199.21,2849.21) 2157.34,2807.34 ccw(c2199.21,2849.21) pad.1@2199.21,2790 ; pad.1@2199.21,2790 ccw(c2199.21,2730.79) 2157.34,2772.66 cw(c2199.21,2730.79) pad.1@2199.21,2790
RESET: C16.1 R15.2 S1.2 U1.7 U2.7 | length 2745.1
  Top Layer w6: U2.7@1535.52,2183.72 1555.81,2163.43 1555.81,2110.27 U1.7@1574.91,2091.17
  Top Layer w10: v2@1500,2219.24 U2.7@1535.52,2183.72 ; v1@1603.8,2464.76 ccw(c1617.87,2467.64) 1614.15,2453.77 ; v1(1605,2620) 1605,2640 ; v1@1605.24,2466.2 cw(c1602.36,2452.13) 1616.23,2455.85 ; v1@1610,2460 1630,2440 ; R15.2@1630,2400.43 1630,2440 ; C16.1@1748.27,2721.53 ccw(c1767.79,2714.49) 1758.03,2696.17 ; C16.1@1749.94,2722.39 cw(c1740.39,2688.4) 1774.49,2697.53 ; C16.1@1757.33,2729.38 cw(c1734.16,2704.57) C16.1@1768.09,2705.73 ; C16.1@1757.68,2718.14 ccw(c1778.77,2710.53) 1768.22,2690.74 ; 1780.02,2669.27 ccw(c1837.67,2681.82) S1.2@1809.08,2630.21 ; S1.2@1784.72,2647.69 ccw(c1823.43,2656.12) S1.2@1804.23,2621.47 ; 1790.64,2665.93 ccw(c1826.99,2673.85) S1.2@1813.39,2639.21 ; S1.2@1821.57,2645 C16.1@1760,2706.57 ; 1605,2640 cw(c1586.61,2640) 1599.06,2626.46 ccw(c1586.61,2640) 1605,2640 ; 1605,2640 ccw(c1623.39,2640) 1610.94,2626.46 cw(c1623.39,2640) 1605,2640 ; 1605,2640 1670,2705 1680,2715 1760,2715 C16.1@1760,2706.57 ; 1619.99,2450.01 cw(c1634.98,2465) 1613.78,2465 ccw(c1634.98,2465) 1619.99,2450.01 ; 1619.99,2450.01 ccw(c1605,2435.02) 1605,2456.22 cw(c1605,2435.02) 1619.99,2450.01 ; 1630,2440 cw(c1599.02,2440) 1617.71,2415.29 ccw(c1599.02,2440) 1630,2440 ; 1630,2440 ccw(c1664.73,2440) 1641.43,2414.24 cw(c1664.73,2440) 1630,2440 ; C16.1@1760,2706.57 cw(c1694.01,2640.58) 1787.23,2636.16 ccw(c1694.01,2640.58) C16.1@1760,2706.57 ; v2@1500,2213.19 cw(c1500,2198.58) 1510.33,2208.91 ccw(c1500,2198.58) v2@1500,2213.19 ; v2@1506.81,2220 ccw(c1525.09,2220) 1512.16,2207.08 cw(c1525.09,2220) v2@1506.81,2220 ; 1689.97,2715 ccw(c1689.97,2780.66) 1736.4,2734.23 cw(c1689.97,2780.66) 1689.97,2715 ; 1714.11,2715 ccw(c1714.11,2756.52) 1743.47,2727.16 cw(c1714.11,2756.52) 1714.11,2715 ; 1719.25,2715 cw(c1719.25,2690.74) 1736.4,2707.9 ccw(c1719.25,2690.74) 1719.25,2715 ; C16.1@1745.36,2702.92 cw(c1734.3,2655.18) 1775.88,2681.11 ccw(c1734.3,2655.18) C16.1@1745.36,2702.92 ; C16.1@1747.62,2712.66 cw(c1742.01,2688.44) 1763.1,2701.6 ccw(c1742.01,2688.44) C16.1@1747.62,2712.66 ; C16.1@1749.57,2702.44 cw(c1749.57,2667.28) 1774.43,2692.14 ccw(c1749.57,2667.28) C16.1@1749.57,2702.44 ; C16.1@1758.19,2721.06 ccw(c1788.8,2721.06) 1767.15,2699.42 cw(c1788.8,2721.06) C16.1@1758.19,2721.06 ; C16.1@1767.71,2716.86 ccw(c1807.56,2707.62) 1772.85,2685.97 cw(c1807.56,2707.62) C16.1@1767.71,2716.86 ; C16.1@1768.19,2721.06 ccw(c1822.94,2721.06) 1784.22,2682.35 cw(c1822.94,2721.06) C16.1@1768.19,2721.06 ; 1775.99,2690.58 cw(c1724.54,2639.13) 1797.22,2635.69 ccw(c1724.54,2639.13) 1775.99,2690.58 ; 1791.98,2674.59 cw(c1755.07,2637.69) 1807.21,2635.21 ccw(c1755.07,2637.69) 1791.98,2674.59
  Bottom Layer w10: v2(1500,2220) 1518.16,2220 1605,2306.84 1605,2325 v1(1605,2465) v1(1605,2620) ; 1516.44,2220 cw(c1516.44,2236.44) 1504.82,2224.82 ccw(c1516.44,2236.44) 1516.44,2220 ; 1516.44,2220 ccw(c1516.44,2203.56) 1504.82,2215.18 cw(c1516.44,2203.56) 1516.44,2220 ; 1605,2443.8 cw(c1626.2,2443.8) 1611.21,2458.79 ccw(c1626.2,2443.8) 1605,2443.8 ; 1605,2443.8 ccw(c1583.8,2443.8) 1598.79,2458.79 cw(c1583.8,2443.8) 1605,2443.8 ; 1605,2486.2 cw(c1583.8,2486.2) 1598.79,2471.21 ccw(c1583.8,2486.2) 1605,2486.2 ; 1605,2486.2 ccw(c1626.2,2486.2) 1611.21,2471.21 cw(c1626.2,2486.2) 1605,2486.2 ; 1605,2598.8 cw(c1626.2,2598.8) 1611.21,2613.79 ccw(c1626.2,2598.8) 1605,2598.8 ; 1605,2598.8 ccw(c1583.8,2598.8) 1598.79,2613.79 cw(c1583.8,2598.8) 1605,2598.8
VCC: C1.1 C6.1 C8.1 C9.1 C11.1 C12.1 P3.1 P5.4 P7.1 P7.2 R5.2 R8.1 R9.1 R15.1 S2.2 U1.1 U1.9 U1.24 U1.36 U1.48 U2.1 U2.13 U2.19 U2.32 U2.48 U2.64 U3.5 | length 11216.6
  Top Layer w6: C6.1@1250,2054.57 C6.1@1250,2056.25 ; C6.1@1269.64,2055.79 cw(c1295.87,2052.34) C6.1@1289.02,2077.89 ; C6.1@1275,2054.57 1311.56,2091.13 ; C6.1@1275.59,2055.01 cw(c1305.51,2051.06) 1297.7,2080.22 ; C6.1@1283.96,2046.65 ccw(c1262.34,2080.71) C6.1@1302.2,2074.5 ; U2.13@1452,2100.2 1429.02,2123.19 1399.2,2123.19 1369.39,2153 1320,2153 1311.56,2144.56 1311.56,2091.13 ; 1311.56,2091.13 ccw(c1341.4,2061.29) 1299.44,2056.77 cw(c1341.4,2061.29) 1311.56,2091.13 ; C6.1@1278.94,2069.19 ccw(c1278.94,2094.99) 1297.18,2076.75 cw(c1278.94,2094.99) C6.1@1278.94,2069.19 ; C6.1@1278.94,2075.19 ccw(c1278.94,2115.47) 1307.42,2086.99 cw(c1278.94,2115.47) C6.1@1278.94,2075.19 ; C6.1@1287.51,2055.49 cw(c1309.37,2057.84) 1293.82,2073.39 ccw(c1309.37,2057.84) C6.1@1287.51,2055.49 ; C6.1@1293.48,2056.13 cw(c1325.38,2059.57) 1302.69,2082.26 ccw(c1325.38,2059.57) C6.1@1293.48,2056.13
  Top Layer w10: R9.1@1284.69,1400 1315,1400 1365,1450 1432.37,1450 1482.37,1500 1540.43,1500 C12.1@1580.43,1540 ; C9.1@1290,1834.57 1292.32,1832.25 1365,1832.25 ; U2.19@1438.08,1905.33 1365,1832.25 ; U2.13@1452,2100.2 1473.21,2079 1531.4,2079 U1.9@1547.07,2063.33 1605.4,2005 ; 1556.97,1511.15 ccw(c1547.86,1545.15) C12.1@1581.76,1535.69 ; v1(1560,1985) 1585.4,1985 1605.4,2005 ; C11.1@1580.43,1625 1580.43,1685.78 U2.32@1619.04,1724.38 ; U2.1@1619.04,2267.24 U2.1@1630,2256.27 ; 1626.82,2292.46 cw(c1602.9,2312.56) U2.1@1604.9,2281.38 ; 1686.97,2005 1605.4,2005 ; 1686.97,2174.69 U1.1@1658.42,2174.69 1660,2176.26 1660,2226.27 U2.1@1630,2256.27 ; 1689.78,2005 1828.11,2005 U1.36@1854.69,1978.42 1907.85,1978.42 U2.48@1953.1,1933.17 2025.84,1860.43 C8.1@2035,1860.43 ; 2006.89,1885.53 cw(c1997.45,1850.29) C8.1@2032.38,1860.83 ; 1298.35,1400 cw(c1298.35,1411.69) 1290.08,1403.42 ccw(c1298.35,1411.69) 1298.35,1400 ; 1298.35,1400 ccw(c1298.35,1388.31) 1290.08,1396.58 cw(c1298.35,1388.31) 1298.35,1400 ; 1322.72,1838.08 ccw(c1327.52,1855.98) v1@1339.38,1841.74 ; 1322.72,1838.08 ccw(c1327.52,1855.98) v1@1339.38,1841.74 ; 1322.72,1838.08 ccw(c1327.52,1855.98) v1@1339.38,1841.74 ; 1323.56,1829.64 cw(c1329.38,1807.94) v1@1340.61,1827.4 ; 1323.56,1829.64 cw(c1329.38,1807.94) v1@1340.61,1827.4 ; 1323.56,1829.64 cw(c1329.38,1807.94) v1@1340.61,1827.4 ; 1325.3,1830.11 ccw(c1320.14,1849.35) v1@1337.4,1839.39 ; 1325.3,1830.11 ccw(c1320.14,1849.35) v1@1337.4,1839.39 ; 1325.3,1830.11 ccw(c1320.14,1849.35) v1@1337.4,1839.39 ; 1330.31,1836.05 cw(c1327.29,1824.77) v1@1337.4,1830.61 ; 1330.31,1836.05 cw(c1327.29,1824.77) v1@1337.4,1830.61 ; 1330.31,1836.05 cw(c1327.29,1824.77) v1@1337.4,1830.61 ; 1365,1832.25 cw(c1365,1846.58) 1352.6,1839.4 ccw(c1365,1846.58) 1365,1832.25 ; 1580.43,1673.89 cw(c1535.48,1673.89) 1567.27,1642.1 ccw(c1535.48,1673.89) 1580.43,1673.89 ; 1580.43,1673.89 ccw(c1625.39,1673.89) 1593.6,1642.1 cw(c1625.39,1673.89) 1580.43,1673.89 ; 1581.2,1985 cw(c1581.2,2006.2) 1566.21,1991.21 ccw(c1581.2,2006.2) 1581.2,1985 ; 1581.2,1985 ccw(c1581.2,1963.8) 1566.21,1978.79 cw(c1581.2,1963.8) 1581.2,1985 ; U2.1@1604.9,2281.38 ccw(c1571.2,2329.56) R15.1@1630,2329.56 ; U2.1@1604.9,2281.38 ccw(c1571.2,2329.56) R15.1@1630,2329.56 ; U2.1@1630,2256.27 R15.1@1630,2329.57 ; C9.1@1300.03,1840.66 ccw(c1320.35,1860.98) 1320.35,1832.25 cw(c1320.35,1860.98) C9.1@1300.03,1840.66 ; C9.1@1307.1,1821.4 cw(c1333.29,1795.21) 1333.29,1832.25 ccw(c1333.29,1795.21) C9.1@1307.1,1821.4 ; C9.1@1307.1,1847.74 ccw(c1344.5,1885.13) 1344.5,1832.25 cw(c1344.5,1885.13) C9.1@1307.1,1847.74 ; C9.1@1317.16,1832.25 ccw(c1317.16,1862.84) 1338.79,1841.21 cw(c1317.16,1862.84) C9.1@1317.16,1832.25 ; 1330.45,1832.25 cw(c1330.45,1820.45) 1338.79,1828.79 ccw(c1330.45,1820.45) 1330.45,1832.25 ; v1@1351.21,1828.79 cw(c1359.55,1820.45) 1359.55,1832.25 ccw(c1359.55,1820.45) v1@1351.21,1828.79 ; U2.13@1466.15,2086.06 ccw(c1483.19,2103.11) 1483.19,2079 cw(c1483.19,2103.11) U2.13@1466.15,2086.06 ; 1541.92,1501.49 cw(c1580.43,1462.98) 1580.43,1517.44 ccw(c1580.43,1462.98) 1541.92,1501.49 ; 1551.43,1510.99 ccw(c1526.36,1536.06) 1561.81,1536.06 cw(c1526.36,1536.06) 1551.43,1510.99 ; C12.1@1558.99,1518.56 cw(c1580.43,1497.12) 1580.43,1527.44 ccw(c1580.43,1497.12) C12.1@1558.99,1518.56 ; U2.1@1610.63,2273.18 ccw(c1584.62,2310.37) 1630,2310.37 cw(c1584.62,2310.37) U2.1@1610.63,2273.18 ; R15.1@1615.77,2316.4 cw(c1581.41,2282.04) 1630,2282.04 ccw(c1581.41,2282.04) R15.1@1615.77,2316.4 ; U2.1@1616.36,2264.99 ccw(c1598.05,2291.18) 1630,2291.18 cw(c1598.05,2291.18) U2.1@1616.36,2264.99 ; 1630,2287.18 cw(c1671.33,2287.18) 1642.1,2316.4 ccw(c1671.33,2287.18) 1630,2287.18 ; U1.1@1652.91,2180.2 ccw(c1635.8,2197.31) 1660,2197.31 cw(c1635.8,2197.31) U1.1@1652.91,2180.2 ; U1.1@1663.94,2169.18 cw(c1677.24,2155.87) 1677.24,2174.69 ccw(c1677.24,2155.87) U1.1@1663.94,2169.18 ; U1.36@1860.2,1972.91 cw(c1873.51,1959.6) 1873.51,1978.42 ccw(c1873.51,1959.6) U1.36@1860.2,1972.91 ; 1990.35,1895.92 ccw(c2031.06,1936.63) 2031.06,1879.06 cw(c2031.06,1936.63) 1990.35,1895.92 ; 2002.97,1883.3 cw(c1980.1,1860.43) 2012.44,1860.43 ccw(c1980.1,1860.43) 2002.97,1883.3 ; 2007.42,1878.85 ccw(c2031.06,1902.49) 2031.06,1869.06 cw(c2031.06,1902.49) 2007.42,1878.85
  Top Layer w20: P7.2@1439.54,2789.91 ccw(c1472.6,2796.68) 1463.86,2764.08 ; P7.2@1440,2790 1521.57,2708.43 1521.57,2645 R8.1@1654.57,2512.01 ; P7.2@1440.09,2790.46 cw(c1433.32,2757.4) 1465.92,2766.14 ; S2.2@1525.96,2634.87 ccw(c1563.36,2645.95) S2.2@1553.26,2608.28 ; C12.1@1580.43,1540 C11.1@1580.43,1605 ; C11.1@1592.23,1627.87 ccw(c1650.29,1661.39) v1@1632.94,1596.64 ; 1617.64,1600.81 ccw(c1628.43,1619.5) v1@1634.02,1598.65 ; 1620,1561.46 cw(c1655.56,1561.46) v1@1636.98,1591.78 ; 1625.3,1579.47 ccw(c1609.64,1594.33) v1@1631.22,1594.9 ; 1627.61,1581.75 cw(c1609.99,1569.27) v1@1631.27,1565.64 ; R8.1@1654.57,2525 R8.1@1654.57,2512.01 ; P3.1@1670,1385 P3.1@1670,1387.11 ; 1699.08,2448.86 ccw(c1731.68,2457.6) P5.4@1724.91,2424.54 ; 1701.14,2450.92 cw(c1692.4,2418.32) P5.4@1725.46,2425.09 ; U3.5@1805.51,1585 1794.57,1574.05 ; 1473.34,2756.66 cw(c1506.67,2790) 1459.53,2790 ccw(c1506.67,2790) 1473.34,2756.66 ; 1473.34,2756.66 ccw(c1440,2723.33) 1440,2770.47 cw(c1440,2723.33) 1473.34,2756.66 ; 1580.43,1588.18 cw(c1613.32,1588.18) 1590.07,1611.43 ccw(c1613.32,1588.18) 1580.43,1588.18 ; 1580.43,1588.18 ccw(c1547.55,1588.18) 1570.8,1611.43 cw(c1547.55,1588.18) 1580.43,1588.18 ; C11.1@1580.43,1605 C11.1@1580.43,1625 ; C11.1@1580.43,1605 1615,1605 ; C11.1@1580.43,1625 1600,1625 1617.5,1607.5 ; C11.1@1580.43,1625 v1(1635,1625) ; C11.1@1580.43,1625 1673.05,1717.62 1673.05,1838.51 1686.97,1852.43 1686.97,2005 1686.97,2174.69 1686.97,2211.75 1725,2249.78 P5.4@1725,2425 1654.57,2495.43 ; 1613.32,1625 cw(c1613.32,1657.89) 1590.07,1634.63 ccw(c1613.32,1657.89) 1613.32,1625 ; 1613.32,1625 ccw(c1613.32,1592.11) 1590.07,1615.37 cw(c1613.32,1592.11) 1613.32,1625 ; 1615,1605 cw(c1615,1587.38) 1631.47,1593.65 ccw(c1615,1587.38) 1615,1605 ; 1615,1605 cw(c1615,1626.35) 1593.9,1623.12 ccw(c1615,1626.35) 1615,1605 ; 1615,1605 1617.5,1607.5 ; 1617.5,1607.5 ccw(c1601.46,1591.46) 1588.32,1609.96 cw(c1601.46,1591.46) 1617.5,1607.5 ; 1617.5,1607.5 1620,1605 ; 1617.5,1607.5 v1(1635,1625) ; 1620.01,1604.99 ccw(c1635,1619.98) v1@1635,1598.78 ; 1620.01,1604.99 ccw(c1635,1619.98) v1@1635,1598.78 ; 1620.01,1604.99 ccw(c1635,1619.98) v1@1635,1598.78 ; 1620.01,1604.99 ccw(c1635,1619.98) v1@1635,1598.78 ; 1620,1605 ccw(c1668.21,1605) 1637.41,1567.91 cw(c1668.21,1605) 1620,1605 ; 1620.01,1604.99 ccw(c1635,1619.98) v1@1635,1598.78 ; 1620.01,1604.99 ccw(c1635,1619.98) v1@1635,1598.78 ; 1620.01,1604.99 ccw(c1635,1619.98) v1@1635,1598.78 ; 1620.01,1604.99 ccw(c1635,1619.98) v1@1635,1598.78 ; 1620,1605 1620,1565 v1(1635,1565) v1(1635,1595) v1(1635,1625) ; 1654.57,2495.43 cw(c1671.87,2495.43) 1662.19,2509.77 ccw(c1671.87,2495.43) 1654.57,2495.43 ; 1654.57,2495.43 ccw(c1637.27,2495.43) 1646.95,2509.77 cw(c1637.27,2495.43) 1654.57,2495.43 ; 1654.57,2495.43 R8.1@1654.57,2512.01 ; P3.1@1670,1387.11 1792.89,1510 R5.2@1794.57,1510 1794.57,1574.05 ; P3.1@1670,1387.11 1670,1410 1783.57,1523.57 1783.57,1563.06 1794.57,1574.05 ; 1691.66,2458.34 cw(c1658.33,2425) 1705.47,2425 ccw(c1658.33,2425) 1691.66,2458.34 ; 1691.66,2458.34 ccw(c1725,2491.67) 1725,2444.53 cw(c1725,2491.67) 1691.66,2458.34 ; 1725,2377.86 cw(c1772.14,2377.86) 1738.81,2411.19 ccw(c1772.14,2377.86) 1725,2377.86 ; 1725,2377.86 ccw(c1677.86,2377.86) 1711.19,2411.19 cw(c1677.86,2377.86) 1725,2377.86 ; 1794.57,1546.82 cw(c1761.68,1546.82) 1784.93,1523.57 ccw(c1761.68,1546.82) 1794.57,1546.82 ; 1794.57,1546.82 ccw(c1827.45,1546.82) 1804.2,1523.57 cw(c1827.45,1546.82) 1794.57,1546.82 ; S2.2@1512.61,2648.81 ccw(c1490.97,2670.45) 1521.57,2670.45 cw(c1490.97,2670.45) S2.2@1512.61,2648.81 ; 1521.57,2693.84 ccw(c1585.25,2693.84) 1540.23,2648.81 cw(c1585.25,2693.84) 1521.57,2693.84 ; S2.2@1526.42,2615.47 cw(c1526.42,2555.88) 1568.56,2598.02 ccw(c1526.42,2555.88) S2.2@1526.42,2615.47 ; S2.2@1545.94,2635 ccw(c1580.64,2635) 1556.11,2610.47 cw(c1580.64,2635) S2.2@1545.94,2635 ; C12.1@1570.8,1553.57 ccw(c1547.55,1576.82) 1580.43,1576.82 cw(c1547.55,1576.82) C12.1@1570.8,1553.57 ; 1580.43,1576.83 ccw(c1613.32,1576.83) 1590.07,1553.57 cw(c1613.32,1576.83) 1580.43,1576.83 ; C11.1@1580.43,1642.56 ccw(c1580.43,1684.95) 1610.41,1654.97 cw(c1580.43,1684.95) C11.1@1580.43,1642.56 ; C11.1@1594.06,1628.94 cw(c1617.44,1628.94) 1600.9,1645.47 ccw(c1617.44,1628.94) C11.1@1594.06,1628.94 ; C11.1@1601.73,1605 cw(c1601.73,1561.73) 1632.33,1592.33 ccw(c1601.73,1561.73) C11.1@1601.73,1605 ; 1602.41,2564.16 ccw(c1654.57,2616.32) 1654.57,2542.56 cw(c1654.57,2616.32) 1602.41,2564.16 ; v1@1634.71,1571.67 cw(c1646.89,1580.44) 1637.39,1592.07 ccw(c1646.89,1580.44) v1@1634.71,1571.67 ; R8.1@1648.19,2521.06 ccw(c1694.67,2521.06) 1661.8,2488.2 cw(c1694.67,2521.06) R8.1@1648.19,2521.06 ; R8.1@1668.19,2521.06 ccw(c1762.96,2521.06) 1695.95,2454.05 cw(c1762.96,2521.06) R8.1@1668.19,2521.06 ; P3.1@1670,1404.53 ccw(c1670,1446.57) 1699.73,1416.84 cw(c1670,1446.57) P3.1@1670,1404.53 ; P3.1@1689.53,1385 cw(c1741.78,1385) 1704.83,1421.95 ccw(c1741.78,1385) P3.1@1689.53,1385 ; U2.64@1725,2252.68 cw(c1730.58,2252.68) 1726.63,2256.63 ccw(c1730.58,2252.68) U2.64@1725,2252.68 ; 1725,2287.15 cw(c1773.48,2287.15) 1739.2,2321.43 ccw(c1773.48,2287.15) 1725,2287.15 ; 1725,2382.85 ccw(c1773.48,2382.85) 1739.2,2348.57 cw(c1773.48,2382.85) 1725,2382.85 ; 1761.72,1478.84 cw(c1794.57,1445.99) 1794.57,1492.44 ccw(c1794.57,1445.99) 1761.72,1478.84 ; R5.2@1775.28,1492.4 ccw(c1761.62,1506.06) 1780.94,1506.06 cw(c1761.62,1506.06) R5.2@1775.28,1492.4
  Bottom Layer w10: v1(1345,1835) 1385,1835 1540,1990 ; v1@1555,1990 1540,1990 ; 1366.2,1835 cw(c1366.2,1856.2) 1351.21,1841.21 ccw(c1366.2,1856.2) 1366.2,1835 ; 1366.2,1835 ccw(c1366.2,1813.8) 1351.21,1828.79 cw(c1366.2,1813.8) 1366.2,1835 ; 1540,1990 cw(c1540,1977.38) 1551.8,1981.87 ccw(c1540,1977.38) 1540,1990
  Bottom Layer w20: P7.2@1440,2790 P7.1@1440,2890 ; 1645.48,1426.55 ccw(c1687.66,1450.9) P3.1@1675.05,1403.86 ; 1646.58,1424.65 cw(c1607.11,1401.85) P3.1@1651.14,1390.05 ; 1647.39,1459.56 1653.73,1465.9 1653.73,1606.27 v1(1635,1625) v1(1635,1595) v1(1635,1565) 1635,1420 P3.1@1670,1385 ; 1650.56,1462.73 cw(c1587.14,1424.71) P3.1@1655.2,1395.8 ; 1654.76,1439.65 cw(c1628.7,1402.54) P3.1@1670.43,1384.82 ; 1440,2837.14 cw(c1392.86,2837.14) 1426.19,2803.81 ccw(c1392.86,2837.14) 1440,2837.14 ; 1440,2837.14 ccw(c1487.14,2837.14) 1453.81,2803.81 cw(c1487.14,2837.14) 1440,2837.14 ; 1440,2842.86 cw(c1487.14,2842.86) 1453.81,2876.19 ccw(c1487.14,2842.86) 1440,2842.86 ; 1440,2842.86 ccw(c1392.86,2842.86) 1426.19,2876.19 cw(c1392.86,2842.86) 1440,2842.86 ; 1636.66,1418.34 cw(c1603.33,1385) 1650.47,1385 ccw(c1603.33,1385) 1636.66,1418.34 ; 1636.66,1418.34 ccw(c1670,1451.67) 1670,1404.53 cw(c1670,1451.67) 1636.66,1418.34 ; 1635,1420.07 ccw(c1705.07,1420.07) 1655.52,1370.52 cw(c1705.07,1420.07) 1635,1420.07 ; 1635,1468.36 ccw(c1753.36,1468.36) 1669.67,1384.67 cw(c1753.36,1468.36) 1635,1468.36 ; 1635,1516.64 ccw(c1801.64,1516.64) 1683.81,1398.81 cw(c1801.64,1516.64) 1635,1516.64
  other v1: 1675,1435
VCC5V: J1.1 U3.1 U3.3 | length 832.8
  Top Layer w25: 1875.31,1653.4 1860,1638.09 1860,1595 1870,1585 ; U3.3@1881.71,1659.8 U3.3@1900,1659.8 1975.2,1659.8 2066.5,1568.5 2066.5,1355 2036.5,1325 2015,1325 1975,1365 1975,1375 ; U3.1@1900,1585 1870,1585 ; 1870,1585 ccw(c1882.17,1597.17) 1891.62,1582.78 cw(c1882.17,1597.17) 1870,1585 ; 1880.28,1658.37 cw(c1890.16,1648.49) U3.3@1890.16,1662.46 ; 1880.28,1658.37 cw(c1890.16,1648.49) U3.3@1890.16,1662.46 ; 1880.28,1658.37 cw(c1890.16,1648.49) U3.3@1890.16,1662.46 ; 1880.28,1658.37 cw(c1890.16,1648.49) U3.3@1890.16,1662.46 ; 1860.28,1594.72 ccw(c1890.16,1624.59) 1890.16,1582.34 cw(c1890.16,1624.59) 1860.28,1594.72
VSSA: C6.2 R1.1 U1.8 U2.12 | length 507.9
  Top Layer w6: C6.2@1275,2125.43 1314.57,2165 1385,2165 ; R1.1@1385.43,2185.43 R1.1@1385.43,2205
  Top Layer w10: R1.1@1385.43,2185.43 1385,2185 1385,2165 ; U1.8@1560.99,2077.25 1543.24,2095 1485.05,2095 U2.12@1465.92,2114.12 1442.86,2137.19 1405,2137.19 1385,2157.19 1385,2165 ; 1385,2165 cw(c1410.03,2165) 1395.93,2185.68 ccw(c1410.03,2165) 1385,2165 ; 1385,2165 ccw(c1358.77,2165) 1374.36,2186.09 cw(c1358.77,2165) 1385,2165 ; U2.12@1480.07,2099.98 ccw(c1492.09,2112) 1492.09,2095 cw(c1492.09,2112) U2.12@1480.07,2099.98
pads on no net: J1.0 J1.5 U3.4
copper on no net:
  other v1: 2140,1280 2140,1370 2140,1410 2140,1460 2140,1500 2140,1590 1195,2890 1230,2890 1265,2890

## Polygon pours and split planes (outlines as drawn)
GND on Bottom Layer "Top Layer-No Net" (solid, remove dead copper, pour order 2): 2140,1590 2140,1280 2140,1260 2100,1220 1725,1220 1245.07,1220 1240,1225.07 1240,1410 1515,1685 1520,1690 1520,1785 1425,1880 1185,1880 1185,2015 1180,2020 1185,2025 1325,2025 1325,2070 1415,2160 1335,2240 1310,2240 1241,2309 1241,2789 1439,2789 1440,2790 1605,2625 1605,2620 1605,2315.5 1680.25,2240.25 1691.96,2251.96 2070,2251.96 2070,2142.13 1955.25,2027.38 1965,2017.63 1965,1926.21 1965,1907.28 1846.75,1789.03 1652.72,1595 1635,1595 1635,1420.25 1670.43,1384.82 1635,1420.25 1635,1565 1635,1560 1465,1390 1535,1320 1835,1320 1941,1426 1941,1516.37 2010,1585.37 2014.63,1590 2140,1590
GND on Top Layer "Top Layer-No Net" (solid, remove dead copper, pour order 6): 1439.54,2789.91 1440.09,2789.91 1521.57,2708.43 1530,2700 1530,2625 1541.57,2625 1596.57,2570 1595,2568.43 1595,2310 1595,2278.72 1517.76,2201.48 1336.28,2020 1320,2020 1335,2020 1416.04,1938.96 1389.92,1912.84 1389.92,1885 1245,1885 1235,1895 1201,1929 1201,1945 1201,2761 1230,2790 1230.09,2789.91 1439.54,2789.91
GND on Top Layer "Top Layer-No Net" (solid, remove dead copper, pour order 10): 1340,2855 2030,2855 2100,2785 2100,2570 2100,2560 2070.06,2530.06 2065.53,2525.53 2065.53,2385 1730,2385 1725,2390 1645,2470 1645,2521.57 1639.84,2521.57 1512.61,2648.81 1381.42,2780 1340,2780

## Keep-outs
Keep-Out Layer:
  lines w6: 995,1035 995,2960 2285,2960 2285,1035 995,1035

## Other copper
Top Layer:
  rectangle net GND: 1995,1487.18 2010,1530

## Silkscreen, mask and mechanical layers (free items; w line width, h text height)
Top Overlay:
  lines w10: 1190,1490 1210,1490 1210,1300 1230,1280 ; 1190,2375 1220,2375 1220,2545 ; 1195,1590 1225,1590 1225,1900 ; 1195,2290 1225,2290 1225,1980 ; 1220,2620 1220,2695 ; 1300,1270 1625,1270 1635,1260 1635,1240 ; 1740,1240 1740,1260 1750,1270 1850,1270 ; 1920,1270 1975,1270 ; 2050,2175 2050,1990 2085,1990 ; 2050,2240 2050,2345
  text "C0" at 1005,2865 h75
  text "3V3" at 1285,2785 h75 r90
  text "GND" at 1240,2775 h75 r90
  text "C1" at 1005,2770 h75
  text "D2" at 2200,2770 h75
  text "B9" at 1555,2760 h75 r90
  text "B8" at 1655,2760 h75 r90
  text "B7" at 1755,2760 h75 r90
  text "B6" at 1855,2760 h75 r90
  text "B5" at 1955,2760 h75 r90
  text "B4" at 2020,2760 h75 r90
  text "B3" at 2080,2760 h75 r90
  text "BOOT0" at 1515,2715 h75
  text "RESET" at 1860,2715 h75
  text "C" at 2215,2715 h75
  text "C2" at 1005,2670 h75
  text "13" at 2200,2670 h75
  text "C" at 2215,2615 h75
  text "C3" at 1005,2570 h75
  text "12" at 2200,2570 h75
  text "C" at 1195,2560 h100
  text "C" at 2215,2515 h75
  text "C4" at 1005,2470 h75
  text "11" at 2200,2470 h75
  text "C" at 2215,2415 h75
  text "C5" at 1005,2370 h75
  text "10" at 2200,2370 h75
  text "A0" at 1005,2270 h75
  text "C9" at 2200,2270 h75
  text "VCC" at 1875,2235 h75 r90
  text "GND" at 1925,2235 h75 r90
  text "SWD" at 1975,2235 h75 r90
  text "SCL" at 2025,2235 h75 r90
  text "C" at 2030,2185 h100
  text "A1" at 1005,2170 h75
  text "C8" at 2200,2170 h75
  text "A2" at 1005,2070 h75
  text "C7" at 2200,2070 h75
  text "STM32" at 1585,1985 h75
  text "A3" at 1005,1970 h75
  text "C6" at 2200,1970 h75
  text "A" at 2215,1915 h75
  text "A" at 1195,1910 h100
  text "A4" at 1005,1870 h75
  text "15" at 2200,1870 h75
  text "A" at 2215,1815 h75
  text "A5" at 1005,1770 h75
  text "14" at 2200,1770 h75
  text "SCK" at 1240,1755 h75
  text "A" at 2215,1715 h75
  text "A6" at 1005,1670 h75
  text "13" at 2200,1670 h75
  text "MISO" at 1235,1665 h75
  text "A7" at 1005,1570 h75
  text "MOSI" at 1235,1570 h75
  text "B0" at 1005,1470 h75
  text "BT1" at 1220,1440 h75
  text "B1" at 1005,1370 h75
  text "GND" at 1295,1280 h75
  text "TX" at 1435,1280 h75
  text "RX" at 1535,1280 h75
  text "VCC" at 1635,1280 h75
  text "B2" at 1005,1270 h75
  text "B" at 1240,1250 h100
  text "A" at 1860,1250 h100
  text "B" at 1115,1080 h75 r90
  text "B" at 1215,1080 h75 r90
  text "B" at 1315,1080 h75 r90
  text "B" at 1415,1080 h75 r90
  text "B" at 1515,1080 h75 r90
  text "B" at 1615,1080 h75 r90
  text "A" at 1915,1080 h75 r90
  text "A" at 2015,1080 h75 r90
  text "A" at 2115,1080 h75 r90
  text "10" at 1160,1060 h75 r90
  text "11" at 1265,1060 h75 r90
  text "12" at 1365,1060 h75 r90
  text "13" at 1465,1060 h75 r90
  text "14" at 1565,1060 h75 r90
  text "15" at 1665,1060 h75 r90
  text "A8" at 1765,1060 h75 r90
  text "A9" at 1865,1060 h75 r90
  text "10" at 1965,1060 h75 r90
  text "11" at 2065,1060 h75 r90
  text "12" at 2165,1060 h75 r90
Bottom Overlay:
  text "B9" at 1555,2830 h75 r90
  text "B8" at 1655,2830 h75 r90
  text "B7" at 1755,2830 h75 r90
  text "B6" at 1855,2830 h75 r90
  text "B5" at 1955,2830 h75 r90
  text "B4" at 2020,2830 h75 r90
  text "B3" at 2080,2830 h75 r90
  text "C0" at 1275,2825 h75
  text "C1" at 1275,2770 h75
  text "D2" at 2080,2715 h75
  text "C2" at 1275,2670 h75
  text "C13" at 2080,2670 h75
  text "C12" at 2080,2575 h75
  text "C3" at 1275,2570 h75
  text "C11" at 2080,2480 h75
  text "C4" at 1275,2470 h75
  text "C5" at 1275,2370 h75
  text "C10" at 2080,2335 h75
  text "A0" at 1275,2270 h75
  text "C9" at 2080,2270 h75
  text "A1" at 1275,2170 h75
  text "C8" at 2080,2170 h75
  text "A2" at 1275,2070 h75
  text "C7" at 2080,2070 h75
  text "A3" at 1275,1970 h75
  text "C6" at 2080,1970 h75
  text "A" at 2065,1915 h75
  text "A4" at 1275,1870 h75
  text "15" at 2080,1870 h75
  text "A" at 2065,1815 h75
  text "A5" at 1275,1770 h75
  text "14" at 2080,1770 h75
  text "A" at 2065,1715 h75
  text "A6" at 1275,1670 h75
  text "13" at 2080,1670 h75
  text "A7" at 1275,1570 h75
  text "B0" at 1275,1470 h75
  text "B1" at 1275,1370 h75
  text "B2" at 1275,1320 h75
  text "10" at 1245,1310 h75 r90
  text "11" at 1295,1310 h75 r90
  text "12" at 1365,1310 h75 r90
  text "13" at 1465,1310 h75 r90
  text "14" at 1565,1310 h75 r90
  text "15" at 1665,1310 h75 r90
  text "A8" at 1765,1310 h75 r90
  text "A9" at 1865,1310 h75 r90
  text "10" at 1965,1310 h75 r90
  text "11" at 2065,1310 h75 r90
  text "12" at 2125,1310 h75 r90
  text "B" at 1415,1290 h75 r90
  text "B" at 1515,1290 h75 r90
  text "B" at 1615,1290 h75 r90
  text "A" at 1915,1290 h75 r90
  text "A" at 2015,1290 h75 r90